# Allegro board Main_v1.5.brd
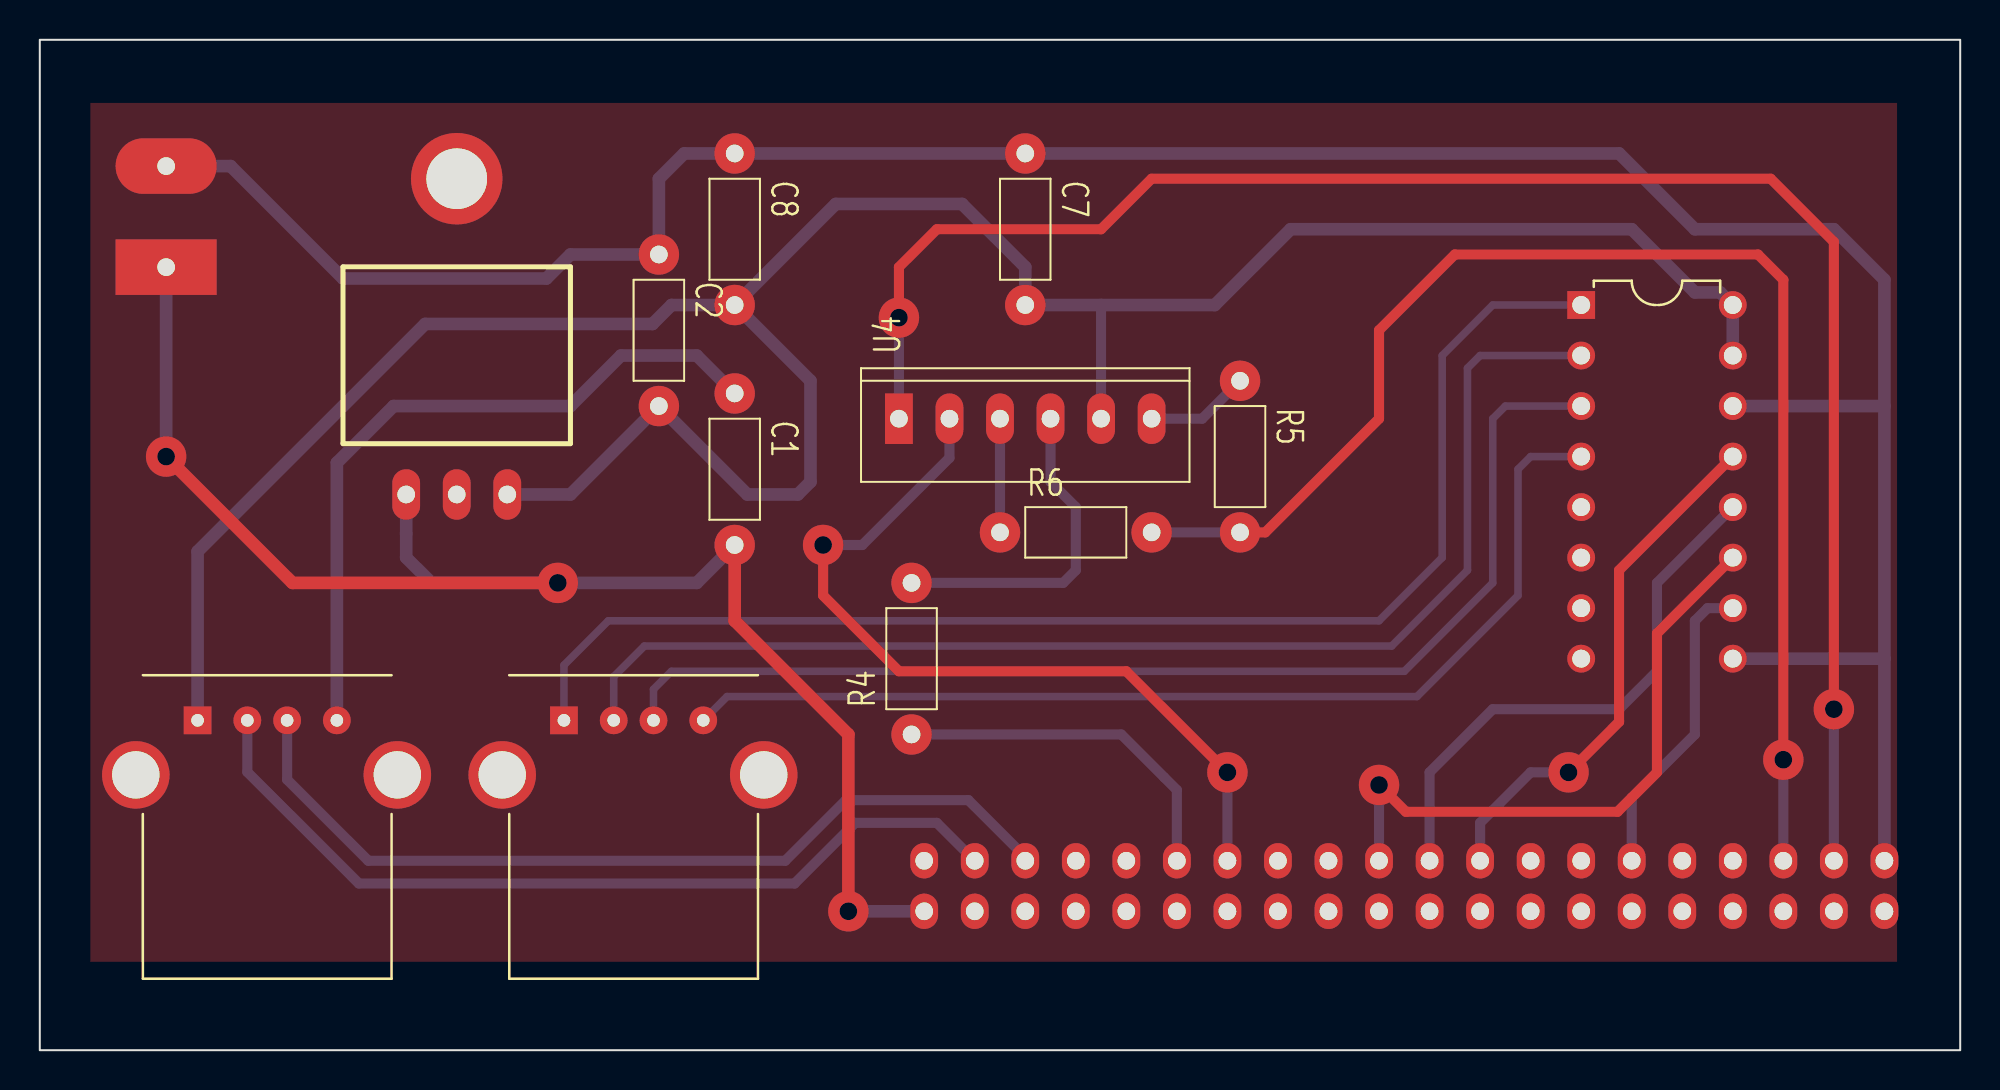
[diagram p0: board, top side]
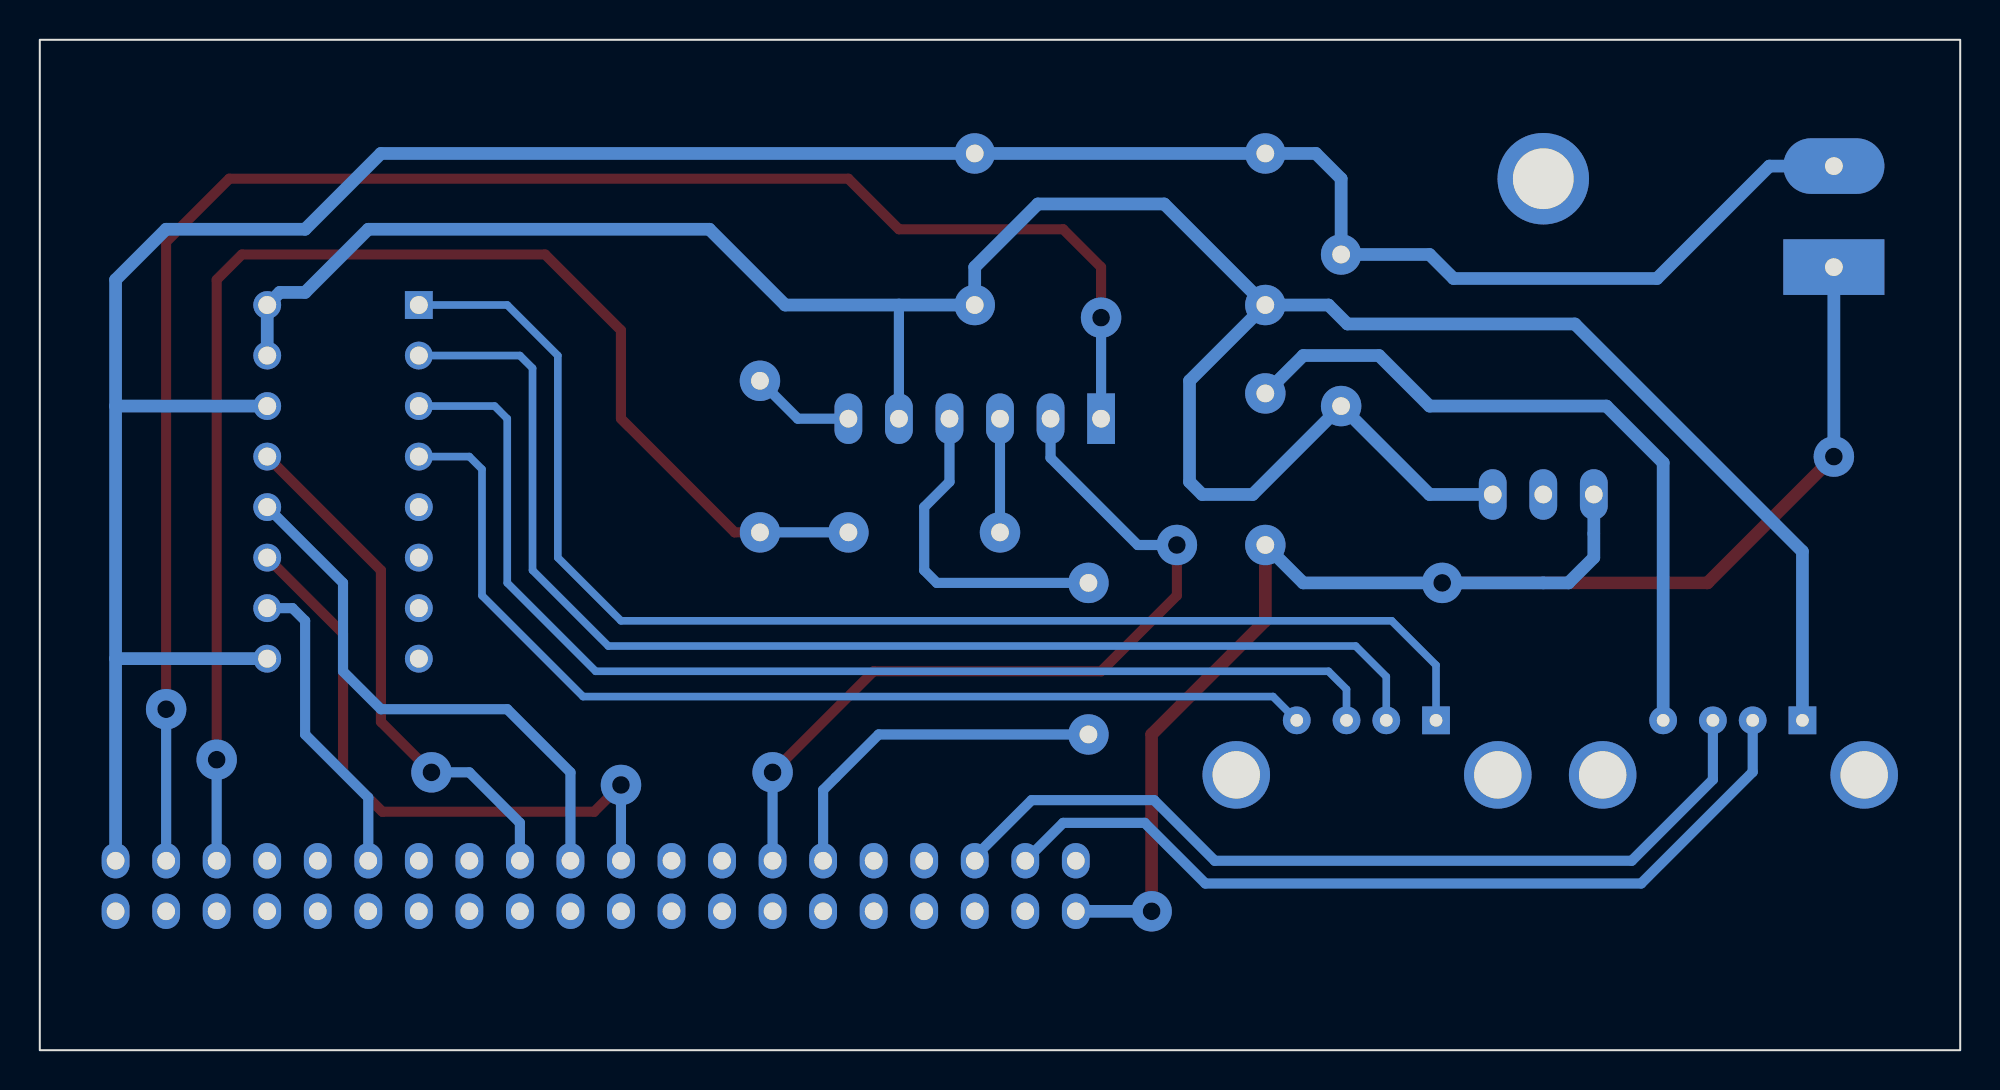
[diagram p1: board, bottom side, seen from below]

Outline 96.52 x 50.8 mm; copper layers: TOP, BOTTOM. Coordinates in mm from the lower left corner of the outline.
Outline path: rectangle 0,0 96.52,50.8

## Design rules (mm)
constraint set DEFAULT: min track width 0.127

## Placement (name value [footprint] x y rotation side)
C1  0.1u  [GU-RC300]  34.92 33.02 270 top
C2  10u  [GU-RC300]  31.11 40 270 top
C7  200p  [GU-RC300]  49.53 45.08 270 top
C8  0.1u  [GU-RC300]  34.92 45.08 270 top
J2  Pi Connector  [20_PIN_HEADER]  82.55 -15.88 90 top
J3  4 HEADER  [USB-A]  29.84 15.87 0 top
J4  4 HEADER  [USB-A]  11.43 15.87 0 top
J5  HEADER 2  [GU-TERMINAL2-200]  6.35 39.37 180 top
R4  51  [GU-RC300]  43.81 15.87 90 top
R5  51  [GU-RC300]  60.32 33.66 270 top
R6  100k  [GU-RC300]  48.26 26.04 0 top
U1  LM2937/TO220  [LM2937]  20.95 30.48 0 top
U4  SPH0645LM4H-B  [GU-MOLEX6]  43.18 31.75 90 top
U5  MCP3008-I/P  [MCP3008]  81.28 28.57 270 top

## Library data of the parts
C1 C2 C7 C8 = C
J2 = HEADER 20X2_0
J3 J4 = 4 HEADER
J5 = HEADER 2: User Part Number: TERMINAL2-200
R4-R6 = R
U1 = LM2937/TO220_0
U4 = SPH0645LM4H-B
U5 = MCP3008-I/P_0

## Footprints (pads in the part's own frame, mm; a bottom-side part is the same pattern mirrored in y, then rotated)
20_PIN_HEADER
  oval 1.778x1.397 hole 0.889: 1(22.86,38.1) 2(25.4,38.1) 3(22.86,35.56) 4(25.4,35.56) 5(22.86,33.02) 6(25.4,33.02) 7(22.86,30.48) 8(25.4,30.48) 9(22.86,27.94) 10(25.4,27.94) 11(22.86,25.4) 12(25.4,25.4) 13(22.86,22.86) 14(25.4,22.86) 15(22.86,20.32) 16(25.4,20.32) 17(22.86,17.78) 18(25.4,17.78) 19(22.86,15.24) 20(25.4,15.24) 21(22.86,12.7) 22(25.4,12.7) 23(22.86,10.16) 24(25.4,10.16) 25(22.86,7.62) 26(25.4,7.62) 27(22.86,5.08) 28(25.4,5.08) 29(22.86,2.54) 30(25.4,2.54) 31(22.86,0) 32(25.4,0) 33(22.86,-2.54) 34(25.4,-2.54) 35(22.86,-5.08) 36(25.4,-5.08) 37(22.86,-7.62) 38(25.4,-7.62) 39(22.86,-10.16) 40(25.4,-10.16)
GU-MOLEX6
  rect 2.54x1.397 hole 0.889: 1(0,0)
  oval 2.54x1.397 hole 0.889: 2(0,-2.54) 3(0,-5.08) 4(0,-7.62) 5(0,-10.16) 6(0,-12.7)
GU-RC300
  round 2.032 hole 0.889: 1(0,0) 2(7.62,0)
GU-TERMINAL2-200
  rect 5.08x2.794 hole 0.889: 1(0,0)
  oval 5.08x2.794 hole 0.889: 2(0,-5.08)
LM2937
  round 4.6 hole 3.05: (0,13.335)
  oval 1.397x2.54 hole 0.889: 1(-2.54,-2.54) 2(0,-2.54) 3(2.54,-2.54)
MCP3008
  rect 1.4x1.4 hole 0.9: 1(-8.89,-3.81)
  round 1.4 hole 0.9: 2(-6.35,-3.81) 3(-3.81,-3.81) 4(-1.27,-3.81) 5(1.27,-3.81) 6(3.81,-3.81) 7(6.35,-3.81) 8(8.89,-3.81) 9(8.89,3.81) 10(6.35,3.81) 11(3.81,3.81) 12(1.27,3.81) 13(-1.27,3.81) 14(-3.81,3.81) 15(-6.35,3.81) 16(-8.89,3.81)
USB-A
  round 3.396 hole 2.38: (-6.604,-2.032) (6.54,-2.032)
  rect 1.397x1.397 hole 0.635: 1(-3.5,0.71)
  round 1.397 hole 0.635: 2(-1,0.71) 3(1,0.71) 4(3.5,0.71)

## Nets
3.3V: C2.2 C7.2 C8.2 J4.1 U1.3(OUT) U4.5 U5.15(VREF) U5.16
GND: C1.1 C2.1 C7.1 C8.1 J2.40 J4.4 J5.2 R6.1 U1.2 U4.3 U5.9 U5.14
BCLK: R4.2 U4.4
DOUT: J2.36 R5.2 R6.2
MISO: J2.22 U5.12
MOSI: J2.20 U5.11
NOT_CS: J2.30 U5.10
PIN2_5V: C1.2 J2.1 J5.1 U1.1
PIN4_5V: J2.3
SCL: J2.6 J4.3
SCLK: J2.24 U5.13
SDA: J2.4 J4.2
SEL: J2.14 U4.2
WS: J2.38 U4.1(WS)
N51205: J2.12 R4.1
N51557: R5.1 U4.6
N57219: J3.1 U5.1
N57223: J3.2 U5.2
N57227: J3.3 U5.3
N57231: J3.4 U5.4

Pads without a net: J2 2 5 7 8 9 10 11 13 15 16 17 18 19 21 23 25 26 27 28 29 31 32 33 34 35 37 39; U5 5 6 7 8

## Via types
v1: diameter 2.032, hole 0.889, TOP to BOTTOM, 10 vias

## Routing (per net, layer and track width the routed paths; a pad name or vN(x,y) marks a point on that pad's centre or on a via; arc(x,y) is an arc through that point)
3.3V: length 137.2
  BOTTOM w0.508: U4.5 53.34,37.46
  BOTTOM w0.635: U1.3 26.67,27.94 C2.2 35.56,27.94 38.1,27.94 38.73,28.57 38.73,33.66 C8.2 ; J4.1 7.93,25.07 19.37,36.51 30.8,36.51 31.75,37.46 C8.2 ; C8.2 40,42.55 46.35,42.55 49.53,39.37 C7.2 59.05,37.46 62.86,41.27 80.01,41.27 83.19,38.1 84.45,38.1 85.09,37.46 U5.15
GND: length 182.3
  BOTTOM w0.508: U4.3 R6.1
  BOTTOM w0.635: J5.2 9.59,44.45 15.24,38.8 25.46,38.8 26.67,40 C2.1 31.11,43.81 32.38,45.08 C8.1 C7.1 79.38,45.08 83.19,41.27 90.17,41.27 92.71,38.73 92.71,32.38 ; J2.40 92.71,19.68 ; 92.71,19.68 92.71,32.38 ; 92.71,19.68 U5.9 ; C1.1 33.02,34.92 29.21,34.92 26.67,32.38 17.78,32.38 14.93,29.54 J4.4 ; 92.71,32.38 U5.14
BCLK: length 16.7
  BOTTOM w0.508: U4.4 50.8,28.57 52.07,27.3 52.07,24.13 51.43,23.49 43.81,23.49
DOUT: length 69.9
  TOP w0.508: v1(87.63,14.6) 87.63,38.73 86.36,40 71.12,40 67.31,36.2 67.31,31.75 61.59,26.04 R5.2
  BOTTOM w0.508: R6.2 R5.2 ; v1(87.63,14.6) J2.36
MISO: length 27.8
  BOTTOM w0.508: J2.22 69.85,13.97 73.03,17.14 79.38,17.14 81.28,19.05 81.28,23.49 U5.12
MOSI: length 31.5
  TOP w0.508: v1(67.31,13.33) 68.66,11.99 79.3,11.99 81.28,13.97 81.28,20.95 U5.11
  BOTTOM w0.508: v1(67.31,13.33) 67.31,9.52
NOT_CS: length 15.5
  BOTTOM w0.508: 85.09,22.22 83.82,22.22 83.19,21.59 83.19,15.87 80.01,12.7 J2.30
PIN2_5V: length 77.4
  TOP w0.635: v1(40.64,6.98) 40.64,15.87 34.92,21.59 C1.2 ; v1(6.35,29.84) 12.7,23.49 v1(26.03,23.49)
  BOTTOM w0.635: v1(40.64,6.98) 44.45,6.98 ; v1(6.35,29.84) J5.1 ; C1.2 33.02,23.49 v1(26.03,23.49) 19.68,23.49 18.41,24.76 U1.1
SCL: length 44.4
  BOTTOM w0.508: 49.53,9.52 49.53,9.72 46.67,12.57 40.51,12.57 37.46,9.52 16.51,9.52 12.43,13.61 J4.3
SCLK: length 26.7
  TOP w0.508: U5.13 79.38,24.13 79.38,16.51 v1(76.83,13.97)
  BOTTOM w0.508: J2.24 72.39,11.43 74.93,13.97 v1(76.83,13.97)
SDA: length 43.5
  BOTTOM w0.508: 46.99,9.52 45.09,11.43 40.99,11.43 37.94,8.38 16.04,8.38 10.43,13.99 J4.2
SEL: length 41.1
  TOP w0.508: v1(59.69,13.97) 54.61,19.05 43.18,19.05 39.37,22.86 v1(39.37,25.4)
  BOTTOM w0.508: v1(59.69,13.97) 59.69,9.52 ; U4.2 45.72,29.78 41.34,25.4 v1(39.37,25.4)
WS: length 88.9
  TOP w0.508: v1(90.17,17.14) 90.17,40.64 87,43.81 55.88,43.81 53.34,41.27 45.09,41.27 43.18,39.37 v1(43.18,36.83)
  BOTTOM w0.508: U4.1 v1(43.18,36.83) ; v1(90.17,17.14) J2.38
N51205: length 18
  BOTTOM w0.508: 57.15,9.52 57.15,13.08 54.36,15.87 R4.1
N51557: length 5.2
  BOTTOM w0.508: R5.1 58.42,31.75 U4.6
N57219: length 67.4
  BOTTOM w0.381: 77.47,37.46 73.03,37.46 70.48,34.92 70.48,24.76 67.31,21.59 28.57,21.59 26.34,19.36 J3.1
N57223: length 63.5
  BOTTOM w0.381: U5.2 72.39,34.92 71.75,34.29 71.75,24.13 67.94,20.32 30.39,20.32 28.85,18.78 J3.2
N57227: length 58.9
  BOTTOM w0.381: J3.3 30.84,18.14 31.75,19.05 68.58,19.05 73.03,23.49 73.03,31.75 73.66,32.38 U5.3
N57231: length 53.3
  BOTTOM w0.381: J3.4 34.54,17.78 69.22,17.78 74.3,22.86 74.3,29.21 74.93,29.84 U5.4

## Copper pours and planes (outline as drawn; the poured copper is in the pictures)
GND on TOP: 2.54,4.45 2.54,47.62 93.34,47.62 93.34,4.45
